# Altium PCB Calibration_Laser_Board.PcbDoc
Units mm, origin at the board's own origin, x right, y up, seen from the top; angles counter-clockwise.
Board outline 14.99 x 20 mm, 2 copper layers (Top Layer, Bottom Layer); 2 components, 4 nets, 12 pads, 0 vias.
Unrouted connection lines stored in the file: 1.
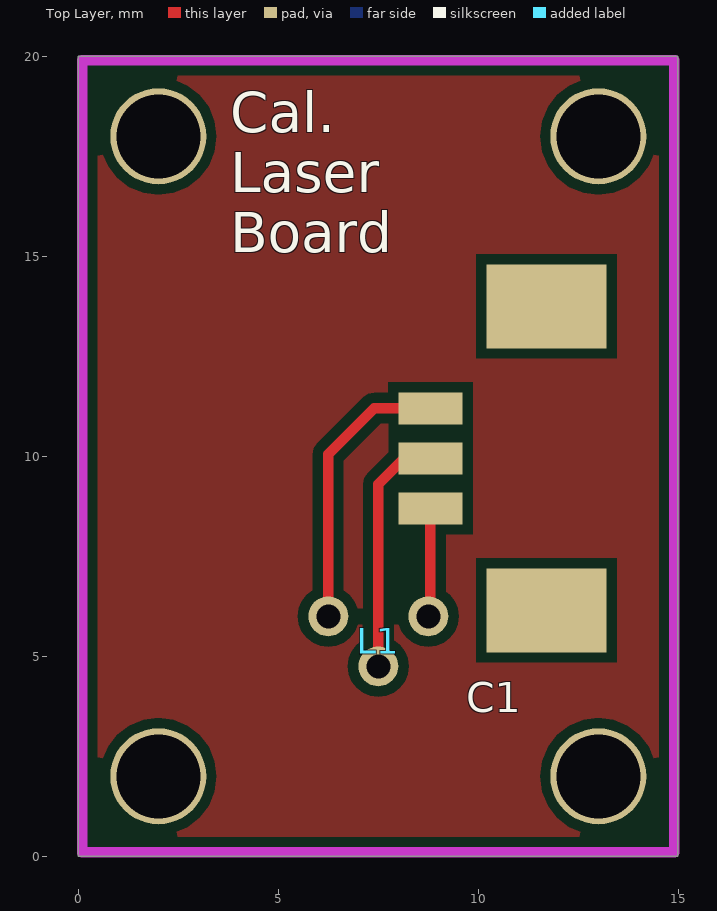
[diagram p0: Top Layer view]
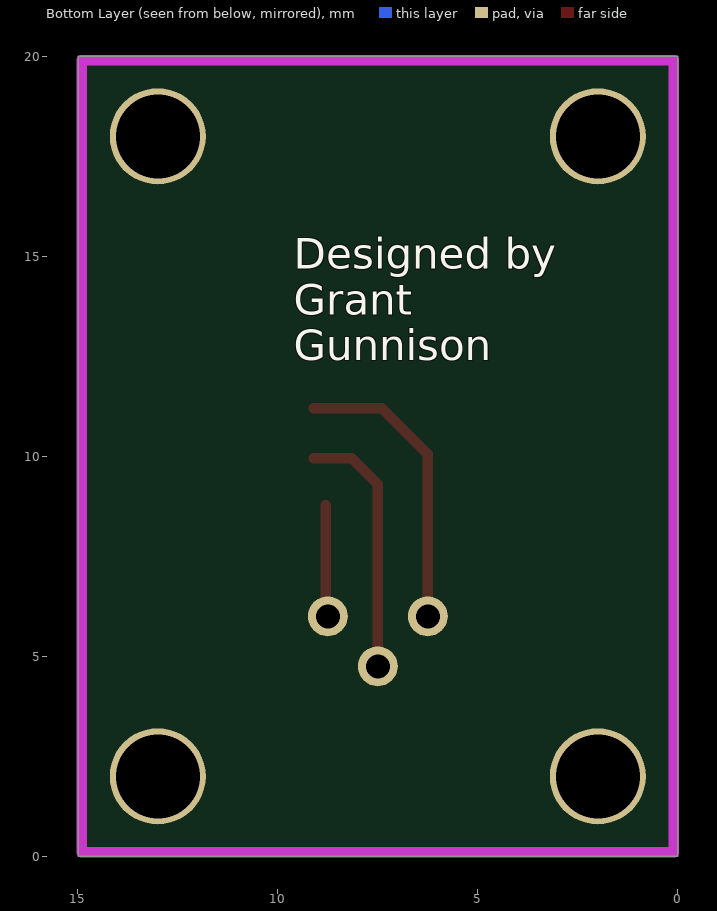
[diagram p1: Bottom Layer view, seen from below]

## Layer stack, top to bottom
Top Solder: solder mask 0.0102, Solder Resist, Dk 3.5
Top Layer: signal copper 0.0356
Dielectric 1: dielectric 0.32, FR-4, Dk 4.8
Bottom Layer: signal copper 0.0356
Bottom Solder: solder mask 0.0102, Solder Resist, Dk 3.5

## Board outline
0,0 14.986,0 14.986,20 0,20

## Design rules (kind name [scope] priority, off if disabled: settings)
Clearance [All] p1: gap=0.254 ignorepadtopadclearanceinfootprint=FALSE except(0: Arc-Hole Track-Hole SMDPad-Hole THPad-Hole Via-Hole Fill-Hole Poly-Hole Region-Hole Text-Hole)
PolygonConnect [All] p1: connectstyle=Relief reliefconductorwidth=0.254 reliefentries=4 polygonreliefangle="90 Angle" airgapwidth=0.254
RoutingVias [All] p1: holewidth=0.711 width=1.27 viastyle="Through Hole" minholewidth=0.711 minwidth=1.27 maxholewidth=0.711 maxwidth=1.27
SolderMaskExpansion [All] p1: expansion=0.102
Width [All] p1: maxlimit=0.254 minlimit=0.254 preferedwidth=0.254
30 further rules are at their usual default settings.

## Components (designator, comment, footprint, x,y, rotation, side; value= is the part's Value field where it differs from the comment)
C1 "53261-7003" 532617003 13.75,5.642 r90 top (schematic designator C?)
L1 "QFLD-635-1SAX" QFLD-635-1SAX 7.5,6 r90 top

## Footprints (in the part's own frame and the unit in brackets; to place one, negate y for a bottom-side part, rotate by r counter-clockwise, add the part's x,y. Pads: shape width x height; smd on the part's side, far side on the other; paste and mask are expansions set on the pad)
532617003 [mm]
  rect 0.8x1.6 smd: 1(3.058,4.948) 2(4.308,4.948) 3(5.558,4.948)
  rect 2.1x3 smd: 4(0.508,2.048) 5(8.108,2.048)
  body extent -0.14,-0.06 8.76,5.14, height 3.38
QFLD-635-1SAX [mm]
  round 1 hole 0.6: 1(0,-1.25) 2(-1.25,0) 3(0,1.25)

## Free pads (board coordinates)
  round 2.4 hole 2.1: 1(2,18) 2(2,2) 3(13,2) 4(13,18)

## Nets (pads, with @x,y where several pads share a name; then routed paths per layer and width w, separated by ;. In a path a pad name is that pad's centre, name@x,y a point inside that pad or via, vN(x,y) a via of type N, cw(c..) or ccw(c..) an arc to the next point about the centre after c; other vN are vias at no path point)
GND: C1.4 C1.5
NetC1_1: C1.1 L1.1 | length 2.7
  Top Layer w0.254: L1.1@8.8,6.1 C1.1@8.8,8.775
NetC1_2: C1.2 L1.2 | length 5.9
  Top Layer w0.254: 7.5,5.258 7.5,9.3 8.15,9.95 C1.2 C1.2@9.1,9.95
NetC1_3: C1.3 L1.3 | length 7.4
  Top Layer w0.254: L1.3 6.25,10.05 7.4,11.2 C1.3 C1.3@9.1,11.2

## Polygon pours and split planes (outlines as drawn)
no net on Top Layer "Top Layer-No Net" (solid, pour order 0): 0.4,19.6 14.6,19.6 14.6,0.4 0.4,0.4

## Keep-outs
Keep-Out Layer:
  lines w0.254: 0.1,0.1 14.9,0.1 14.9,19.9 0.1,19.9 0.1,0.1

## Silkscreen, mask and mechanical layers (free items; w line width, h text height)
Top Overlay:
  text "Cal. / Laser  / Board" at 3.8,15.1 h1
Bottom Overlay:
  text "Designed by / Grant  / Gunnison" at 9.6,12.4 h0.76